# Altium PCB Pedal_Filters.PcbDoc (part 3 of 4)
Units mm, origin at the board's own origin, x right, y up, seen from the top; angles counter-clockwise.
Board outline 120.65 x 86.55 mm, 4 copper layers (Top Layer, Layer 1, Layer 2, Bottom Layer); 245 components, 181 nets, 879 pads, 470 vias.
Unrouted connection lines stored in the file: 24.
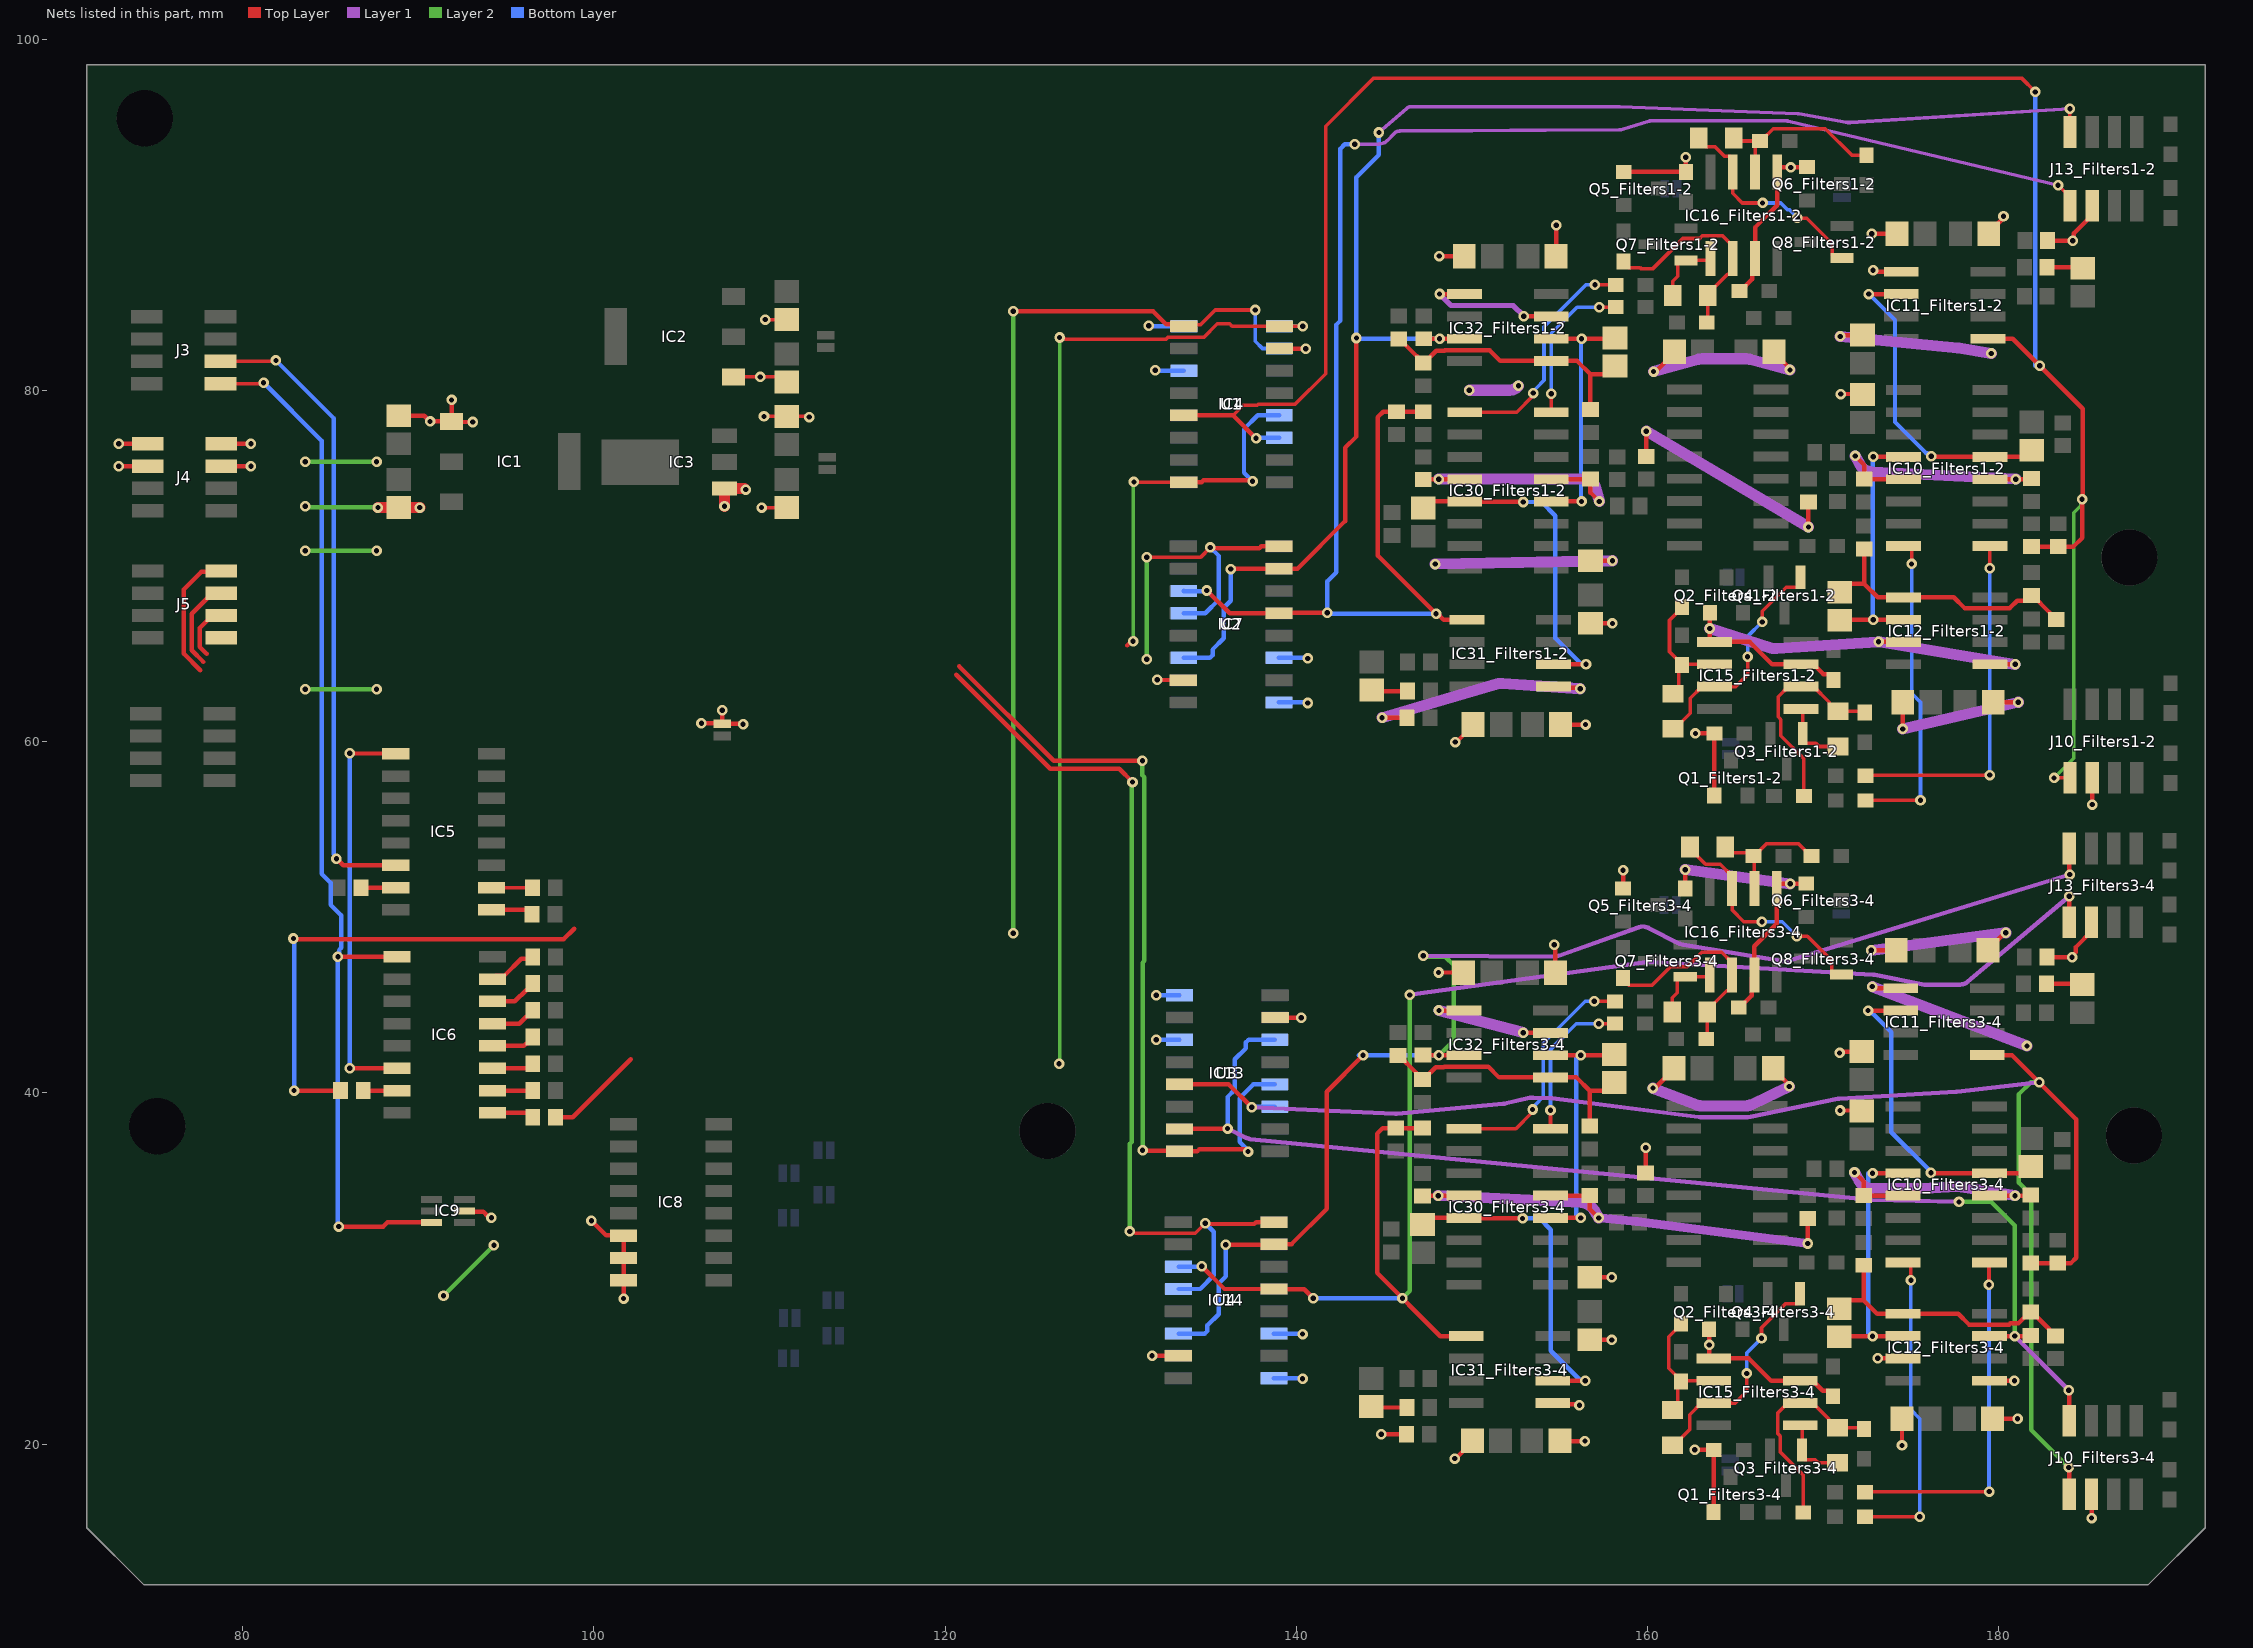
[diagram p5: the nets of this part, all layers, seen from the top]

## Via types
v1: diameter 0.6, hole 0.3, Top Layer to Bottom Layer, tented both sides, 470 vias

## Nets (pads, with @x,y where several pads share a name; then routed paths per layer and width w, separated by ;. In a path a pad name is that pad's centre, name@x,y a point inside that pad or via, vN(x,y) a via of type N, cw(c..) or ccw(c..) an arc to the next point about the centre after c; other vN are vias at no path point) (continued)
Fhp1_Filters3-4: IC12_Filters3-4.7 IC13.7 J10_Filters3-4.8 R5_Filters3-4.2 U3.11 | length 70.3
  Top Layer w0.254: IC13.7@133.339,37.941 133.351,37.953 136.08,37.953 v1(136.091,37.964) ; IC12_Filters3-4.7@179.48,26.151 179.482,26.149 180.911,26.149 v1(180.913,26.151) 181.812,26.151 R5_Filters3-4.2@181.839,26.177 ; v1(184,23.063) 184.012,23.052 184.012,21.347 J10_Filters3-4.8@184.023,21.336
  Layer 1 w0.254: v1(136.091,37.964) 137.157,37.435 ccw(c137.46,38.045) 137.394,37.367 172.673,33.906 ccw(c172.822,35.418) 172.787,33.899 v1(177.743,33.788) ; v1(180.913,26.151) v1(184,23.063)
  Layer 2 w0.254: v1(177.743,33.788) 179.572,33.788 180.913,32.447 v1(180.913,26.151)
  Bottom Layer w0.254: v1(136.091,37.964) 136.091,39.765 136.499,40.173 136.499,41.912 137.136,42.548 137.136,42.872 137.285,43.021 U3.11@138.776,43.021
Fhp2_Filters1-2: IC7.7 IC32_Filters1-2.7 J13_Filters1-2.8 R28_Filters1-2.2 U2.11 | length 86
  Top Layer w0.203: J13_Filters1-2.8@184.061,94.717 v1(184.061,96.043)
  Top Layer w0.254: v1(136.279,69.829) 136.29,69.84 IC7.7@139.018,69.84 ; IC7.7@139.018,69.852 140.072,69.852 142.783,72.563 142.783,76.732 143.431,77.38 v1(143.431,82.989) ; R28_Filters1-2.2@147.257,82.947 IC32_Filters1-2.7@149.59,82.947
  Layer 1 w0.203: v1(144.712,94.69) 146.289,96.062 cw(c146.556,95.756) 146.556,96.162 158.402,96.162 cw(c158.402,95.507) 158.428,96.162 168.573,95.755 cw(c168.557,95.349) 168.628,95.749 171.296,95.274 ccw(c171.483,96.319) 171.549,95.259 v1(184.061,96.043) 183.942,95.961 v1@184.061,95.842
  Bottom Layer w0.254: U2.11@133.594,64.772 135.085,64.772 135.234,64.921 135.234,65.245 135.871,65.881 135.871,67.62 136.279,68.028 v1(136.279,69.829) ; v1(144.712,94.69) 144.712,93.424 143.431,92.144 v1(143.431,82.989) 143.484,82.936 147.9,82.936 v1@147.91,82.947
  other v1: 148.164,82.947
Fhp2_Filters3-4: IC14.7 IC32_Filters3-4.7 J13_Filters3-4.8 R28_Filters3-4.2 U4.11 | length 77
  Top Layer w0.254: v1(135.988,31.348) 135.999,31.359 IC14.7@138.727,31.359 ; IC14.7@138.727,31.371 138.744,31.388 139.734,31.388 141.736,33.39 141.736,40.067 v1(143.804,42.135) ; R28_Filters3-4.2@147.219,42.145 IC32_Filters3-4.7@149.552,42.145 ; J13_Filters3-4.8@184.023,53.916 184.034,53.905 184.034,52.444 v1(184.045,52.433)
  Layer 1 w0.254: v1(147.24,47.811) 154.688,47.757 ccw(c154.692,48.438) 154.921,47.796 159.512,49.435 cw(c159.741,48.793) 160.049,49.401 161.846,48.489 ccw(c162.154,49.097) 162.044,48.425 167.741,47.495 ccw(c167.851,48.167) 168.051,47.516 v1(184.045,52.433)
  Layer 2 w0.254: v1(147.24,47.811) 147.302,47.749 148.485,47.749 148.979,47.254 148.979,42.998 v1(148.126,42.145)
  Bottom Layer w0.254: U4.11@133.303,26.291 134.794,26.291 134.943,26.44 134.943,26.764 135.58,27.4 135.58,29.139 135.988,29.547 v1(135.988,31.348) ; v1@143.55,42.135 v1(143.804,42.135) 147.862,42.135 v1@147.872,42.145
Flp1_Filters1-2: IC4.5 IC11_Filters1-2.1 J10_Filters1-2.7 R7_Filters1-2.1 R10_Filters1-2.2 U1.14 | length 118.8
  Top Layer w0.203: 136.405,78.581 136.978,79.154 137.786,79.154 137.843,79.211 139.934,79.211 141.683,80.96 141.683,95.054 144.419,97.79 181.305,97.79 v1(182.093,97.003) ; v1(183.159,57.937) J10_Filters1-2.7@184.061,57.937
  Top Layer w0.254: IC4.5@133.593,78.581 136.405,78.581 v1@137.701,77.285 ; IC11_Filters1-2.1@179.387,82.95 180.8,82.95 v1(182.347,81.403) 184.798,78.952 184.798,73.856 v1(184.754,73.813) 184.754,71.604 184.26,71.109 R10_Filters1-2.2@183.401,71.109 R7_Filters1-2.1@181.877,71.109
  Layer 2 w0.203: v1(183.159,57.937) 184.28,59.058 184.28,73.028 184.685,73.433 184.685,73.743 v1(184.754,73.813)
  Bottom Layer w0.254: v1(137.714,77.285) 137.749,77.319 139.022,77.319 U1.14@139.03,77.311 ; v1@182.093,81.403 v1(182.093,97.003)
Flp1_Filters3-4: IC11_Filters3-4.1 IC13.5 J10_Filters3-4.7 R7_Filters3-4.1 R10_Filters3-4.2 U3.14 | length 93.7
  Top Layer w0.254: IC13.5@133.352,40.481 136.164,40.481 v1(137.46,39.185) ; IC11_Filters3-4.1@179.349,42.149 180.762,42.149 184.422,38.489 184.422,30.613 184.117,30.308 R7_Filters3-4.1@181.839,30.308 ; v1(183.999,18.669) 184.011,18.657 184.011,17.148 J10_Filters3-4.7@184.023,17.136
  Layer 1 w0.254: v1(137.46,39.185) 145.637,38.802 ccw(c145.669,39.482) 145.733,38.804 151.792,39.378 ccw(c151.728,40.056) 151.878,39.392 153.309,39.716 cw(c153.46,39.052) 153.488,39.733 154.508,39.691 cw(c154.48,39.01) 154.565,39.686 162.915,38.625 ccw(c163.106,40.132) 163.106,38.613 165.57,38.613 ccw(c165.57,40.132) 165.876,38.644 170.835,39.664 cw(c170.972,38.997) 170.931,39.677 177.586,40.072 ccw(c177.546,40.752) 177.622,40.075 v1(182.309,40.602)
  Layer 2 w0.254: v1(182.309,40.602) 181.826,40.602 181.158,39.934 181.158,34.887 181.864,34.18 181.864,20.804 v1(183.999,18.669)
  Bottom Layer w0.254: v1(137.46,39.185) 137.495,39.219 138.768,39.219 U3.14@138.776,39.211
Flp2_Filters1-2: IC7.5 IC31_Filters1-2.1 J13_Filters1-2.7 R23_Filters1-2.2 R26_Filters1-2.1 U2.14 | length 102.1
  Top Layer w0.203: v1(183.388,91.694) 183.766,91.316 183.783,91.316 184.061,91.037 J13_Filters1-2.7@184.061,90.517
  Top Layer w0.254: v1(134.91,68.608) 136.206,67.312 IC7.5@139.018,67.312 139.036,67.33 141.752,67.33 v1(141.769,67.348) ; R26_Filters1-2.1@147.231,78.789 144.953,78.789 144.648,78.484 144.648,70.599 v1(147.961,67.285) 148.055,67.285 148.391,66.949 IC31_Filters1-2.1@149.72,66.948
  Layer 1 w0.203: v1(143.328,94.025) 144.716,94.034 ccw(c144.712,94.69) 145.175,94.226 145.6,94.651 cw(c145.905,94.345) 145.902,94.777 158.406,94.851 ccw(c158.402,95.507) 158.593,94.88 160.069,95.33 cw(c160.196,94.918) 160.196,95.349 167.927,95.349 cw(c167.927,94.918) 168.027,95.338 v1(183.388,91.694)
  Bottom Layer w0.254: U2.14@133.594,68.582 133.602,68.574 134.875,68.574 v1(134.91,68.608) ; v1(143.328,94.025) 142.77,94.025 142.517,93.772 142.517,83.981 142.291,83.755 142.291,69.647 141.769,69.125 v1(141.769,67.348) 141.832,67.285 v1(147.961,67.285)
Flp2_Filters3-4: IC14.5 IC31_Filters3-4.1 J13_Filters3-4.7 R23_Filters3-4.2 R26_Filters3-4.1 U4.14 | length 89
  Top Layer w0.254: v1(134.619,30.127) 135.915,28.831 IC14.5@138.727,28.831 138.744,28.814 140.462,28.814 v1(140.97,28.306) ; R26_Filters3-4.1@147.193,37.988 144.915,37.988 144.61,37.683 144.61,29.746 148.209,26.147 IC31_Filters3-4.1@149.682,26.147 ; J13_Filters3-4.7@184.023,49.716 v1(184.023,51.19)
  Layer 1 w0.254: v1(146.461,45.58) 159.888,47.449 cw(c159.982,46.774) 160.02,47.454 172.848,46.731 cw(c172.809,46.051) 172.943,46.719 175.634,46.18 ccw(c175.768,46.848) 175.768,46.167 177.8,46.167 ccw(c177.8,46.848) 178.238,46.327 v1(184.023,51.19)
  Layer 2 w0.254: v1(146.05,28.306) 146.465,28.721 146.465,45.575 v1(146.461,45.58)
  Bottom Layer w0.254: U4.14@133.303,30.101 133.311,30.093 134.584,30.093 v1(134.619,30.127) ; v1(140.97,28.306) v1@145.796,28.306
Fout_1: IC4.8 J5.7 U1.13 | length 22.1
  Top Layer w0.203: v1(130.758,74.792) 130.775,74.774 IC4.8@133.59,74.774
  Top Layer w0.254: J5.7@78.786,65.913 J5.7@78.969,65.73 ; 130.368,65.476 130.615,65.723 v1(130.709,65.723) ; IC4.8@133.593,74.771 134.611,74.771 134.72,74.88 137.466,74.88 v1(137.513,74.833)
  Layer 2 w0.203: v1(130.709,65.723) 130.709,74.743 v1(130.758,74.792)
  Bottom Layer w0.254: v1(137.513,74.833) 137.026,75.319 137.026,77.8 137.807,78.581 U1.13@139.03,78.581
Fout_2: IC7.8 J5.5 U2.13 | length 22.4
  Top Layer w0.203: v1(131.482,70.502) 131.491,70.492 134.544,70.492 v1(135.111,71.06)
  Top Layer w0.254: 77.958,64.994 77.556,65.396 77.556,66.473 78.255,67.172 J5.5@78.775,67.172 ; v1@131.451,64.74 v1(131.494,64.698) ; v1(135.111,71.06) 135.158,71.013 137.904,71.013 138.013,71.122 IC7.8@139.018,71.122
  Layer 2 w0.254: v1(131.482,70.502) 131.494,70.49 v1(131.494,64.698)
  Bottom Layer w0.254: U2.13@133.594,67.312 134.817,67.312 135.598,68.093 135.598,70.574 v1(135.111,71.06)
Fout_3: IC13.8 J5.3 U3.13 | length 51.8
  Top Layer w0.203: v1(131.249,36.734) v1@131.311,36.671
  Top Layer w0.254: 77.768,64.537 77.099,65.207 77.099,67.286 78.266,68.453 J5.3@78.786,68.453 ; 120.816,64.283 126.186,58.913 v1(131.241,58.913) ; v1@131.311,36.671 131.343,36.702 133.321,36.702 IC13.8@133.352,36.671 134.357,36.671 134.466,36.78 137.042,36.78 137.165,36.657 v1(137.259,36.657)
  Layer 2 w0.254: v1(131.241,58.913) 131.241,58.097 131.357,57.981 131.357,47.513 131.249,47.404 v1(131.249,36.734)
  Bottom Layer w0.254: v1(137.259,36.657) 137.259,36.733 136.772,37.219 136.772,39.7 137.553,40.481 U3.13@138.776,40.481
Fout_4: IC14.8 J5.1 U4.13 | length 59.5
  Top Layer w0.203: 130.841,32.011 134.253,32.011 v1(134.82,32.579)
  Top Layer w0.254: 77.586,64.072 76.641,65.017 76.641,68.666 77.654,69.679 78.742,69.679 J5.1@78.786,69.723 ; 120.635,63.818 125.997,58.456 129.919,58.456 v1(130.676,57.699) ; v1(134.82,32.579) 134.867,32.532 137.613,32.532 137.722,32.641 IC14.8@138.74,32.641
  Layer 2 w0.254: v1(130.523,32.11) 130.523,37.089 130.636,37.202 130.636,56.999 130.634,57.001 130.634,57.656 v1(130.676,57.699)
  Bottom Layer w0.254: U4.13@133.303,28.831 134.526,28.831 135.307,29.612 135.307,32.093 v1(134.82,32.579)
Freq1_1_Filters1-2: IC10_Filters1-2.1 R49_Filters1-2.1 | length 20.1
  Top Layer w0.203: R49_Filters1-2.1@172.426,58.058 172.464,58.096 v1(179.497,58.096) ; v1(179.489,69.869) 179.489,71.114 IC10_Filters1-2.1@179.514,71.139
  Bottom Layer w0.203: v1(179.489,69.869) 179.489,58.104 v1(179.497,58.096)
Freq1_1_Filters3-4: IC10_Filters3-4.1 R49_Filters3-4.1 | length 20.1
  Top Layer w0.203: R49_Filters3-4.1@172.388,17.257 172.426,17.295 v1(179.459,17.295) ; v1(179.451,29.068) 179.451,30.313 IC10_Filters3-4.1@179.476,30.338
  Bottom Layer w0.203: v1(179.451,29.068) 179.451,17.303 v1(179.459,17.295)
Freq1_2_Filters1-2: IC30_Filters1-2.1 R60_Filters1-2.1 | length 13.3
  Top Layer w0.203: IC30_Filters1-2.1@149.593,78.759 152.55,78.759 v1@153.454,79.663 ; v1(157.01,86.013) R60_Filters1-2.1@158.192,86.013
  Bottom Layer w0.203: v1(153.498,79.853) 153.498,79.961 153.668,80.131 154.111,80.574 154.111,83.622 156.502,86.013 v1(157.01,86.013)
Freq1_2_Filters3-4: IC30_Filters3-4.1 R60_Filters3-4.1 | length 13.3
  Top Layer w0.203: IC30_Filters3-4.1@149.555,37.958 152.512,37.958 v1@153.416,38.862 ; v1(156.972,45.212) R60_Filters3-4.1@158.154,45.212
  Bottom Layer w0.203: v1(153.46,39.052) 153.46,39.16 153.63,39.33 154.073,39.773 154.073,42.821 156.464,45.212 v1(156.972,45.212)
Freq2_1_Filters1-2: IC10_Filters1-2.16 R50_Filters1-2.1 | length 17.9
  Top Layer w0.203: R50_Filters1-2.1@172.426,56.661 v1(175.552,56.661) ; IC10_Filters1-2.16@174.866,71.139 175.044,70.961 v1(175.044,70.123)
  Bottom Layer w0.203: v1(175.044,70.123) 175.044,62.757 175.552,62.249 v1(175.552,56.661)
Freq2_1_Filters3-4: IC10_Filters3-4.16 R50_Filters3-4.1 | length 18.2
  Top Layer w0.203: R50_Filters3-4.1@172.388,15.86 v1(175.514,15.86) ; IC10_Filters3-4.16@174.549,30.338 174.828,30.338 175.006,30.16 v1(175.006,29.322)
  Bottom Layer w0.203: v1(175.006,29.322) 175.006,21.956 175.514,21.448 v1(175.514,15.86)
Freq2_2_Filters1-2: IC30_Filters1-2.16 R61_Filters1-2.1 | length 8.8
  Top Layer w0.203: v1(154.518,79.811) 154.518,78.762 IC30_Filters1-2.16@154.521,78.759 ; v1(157.264,84.743) R61_Filters1-2.1@158.192,84.743
  Bottom Layer w0.203: v1(154.518,79.811) 154.518,83.267 155.994,84.743 v1(157.264,84.743)
Freq2_2_Filters3-4: IC30_Filters3-4.16 R61_Filters3-4.1 | length 8.8
  Top Layer w0.203: v1(154.48,39.01) 154.48,37.961 IC30_Filters3-4.16@154.483,37.958 ; v1(157.226,43.942) R61_Filters3-4.1@158.154,43.942
  Bottom Layer w0.203: v1(154.48,39.01) 154.48,42.466 155.956,43.942 v1(157.226,43.942)
GND: C1.1 C2.1 C3.2 C4.1 C7.2 C8.2 C13_Filters1-2.2 C13_Filters3-4.2 C14_Filters1-2.2 C14_Filters3-4.2 C15_Filters1-2.2 C15_Filters3-4.2 C16_Filters1-2.2 C16_Filters3-4.2 C17_Filters1-2.2 C17_Filters3-4.2 C18_Filters1-2.2 C18_Filters3-4.2 C19_Filters1-2.2 C19_Filters3-4.2 C20_Filters1-2.1 C20_Filters3-4.1 C21_Filters1-2.1 C21_Filters3-4.1 C22_Filters1-2.1 C22_Filters3-4.1 C23_Filters1-2.1 C23_Filters3-4.1 C24_Filters1-2.1 C24_Filters3-4.1 C25_Filters1-2.1 C25_Filters3-4.1 C26_Filters1-2.1 C26_Filters3-4.1 IC1.1 IC2.1 IC3.1 IC4.15 IC7.15 IC8.6 IC8.7 IC8.8 IC9.5 IC10_Filters1-2.4 IC10_Filters1-2.13 IC10_Filters3-4.4 IC10_Filters3-4.13 IC11_Filters1-2.5 IC11_Filters3-4.5 IC12_Filters1-2.3 IC12_Filters1-2.5 IC12_Filters3-4.3 IC12_Filters3-4.5 IC13.15 IC14.15 IC15_Filters1-2.3 IC15_Filters1-2.5 IC15_Filters3-4.3 IC15_Filters3-4.5 IC16_Filters1-2.3 IC16_Filters1-2.5 IC16_Filters3-4.3 IC16_Filters3-4.5 IC30_Filters1-2.4 IC30_Filters1-2.13 IC30_Filters3-4.4 IC30_Filters3-4.13 IC31_Filters1-2.5 IC31_Filters3-4.5 IC32_Filters1-2.3 IC32_Filters1-2.5 IC32_Filters3-4.3 IC32_Filters3-4.5 J4.1 J4.2 J4.3 J4.4 J6.2 J10_Filters1-2.5 J10_Filters3-4.5 J13_Filters1-2.5 J13_Filters3-4.5 Q1_Filters1-2.1 Q1_Filters3-4.1 Q2_Filters1-2.1 Q2_Filters3-4.1 Q5_Filters1-2.1 Q5_Filters3-4.1 Q6_Filters1-2.1 Q6_Filters3-4.1 R1_Filters1-2.1 R1_Filters3-4.1 R3_Filters1-2.1 R3_Filters3-4.1 R12_Filters1-2.1 R12_Filters3-4.1 R14_Filters1-2.1 R14_Filters3-4.1 R17_Filters1-2.1 R17_Filters3-4.1 R19_Filters1-2.1 R19_Filters3-4.1 R30_Filters1-2.1 R30_Filters3-4.1 R32_Filters1-2.1 R32_Filters3-4.1 R43_Filters1-2.2 R43_Filters3-4.2 R45_Filters1-2.2 R45_Filters3-4.2 R53_Filters1-2.2 R53_Filters3-4.2 R55_Filters1-2.2 R55_Filters3-4.2 U1.6 U1.8 U2.6 U2.8 U3.6 U3.8 U4.6 U4.8 | length 399
  Top Layer w0.203: IC2.1@107.95,80.772 v1(109.474,80.772) 110.706,80.772 C4.1@110.998,80.48 ; v1@108.585,74.422 v1(108.649,74.359) ; v1(109.55,73.33) C7.2@110.998,73.33 ; v1(109.69,78.524) 112.23,78.524 v1(112.268,78.486) ; v1(109.766,84.036) C3.2@110.998,84.036
  Top Layer w0.254: v1(72.944,75.692) J4.4@74.586,75.692 ; v1(72.944,76.962) J4.2@74.586,76.962 ; J4.3@78.786,75.692 v1(80.474,75.692) ; J4.1@78.786,76.962 v1(80.474,76.962) ; C2.1@88.9,78.562 90.348,78.562 v1(90.674,78.236) IC1.1@91.9,78.236 v1(91.9,79.462) ; IC1.1@91.883,78.204 v1(93.109,78.204) ; IC9.5@92.644,33.274 92.675,33.243 93.696,33.243 93.992,32.947 94.101,32.947 v1(94.167,32.881) ; v1(99.865,32.723) 100.696,31.892 101.668,31.892 IC8.6@101.691,31.87 IC8.8@101.691,29.33 v1(101.691,28.285) ; v1@106.146,61.037 106.149,61.04 107.295,61.04 J6.2@107.297,61.037 ; J6.2@107.315,61.025 v1(107.315,61.787) ; J6.2@107.333,61.013 107.335,61.01 108.487,61.01 v1(108.501,60.995) ; v1(131.788,25.024) 131.79,25.022 133.289,25.022 IC14.15@133.29,25.021 ; v1(132.079,63.52) 132.088,63.511 133.572,63.511 IC7.15@133.581,63.502 ; IC13.15@138.789,44.291 138.798,44.282 140.282,44.282 v1(140.291,44.273) ; IC4.15@139.043,82.391 139.052,82.382 140.536,82.382 v1(140.545,82.373) ; v1@144.855,20.559 144.862,20.566 146.267,20.566 R19_Filters3-4.1@146.274,20.559 ; v1@144.893,61.36 144.9,61.367 146.305,61.367 R19_Filters1-2.1@146.312,61.36 ; R30_Filters3-4.1@147.193,34.118 147.223,34.148 IC30_Filters3-4.4@149.555,34.148 ; R30_Filters1-2.1@147.231,74.919 147.261,74.949 v1(148.12,74.949) IC30_Filters1-2.4@149.593,74.949 ; v1@148.111,46.848 148.118,46.855 149.523,46.855 C22_Filters3-4.1@149.53,46.848 ; v1@148.133,44.685 148.136,44.689 149.548,44.689 IC32_Filters3-4.5@149.552,44.685 ; v1@148.149,87.649 148.156,87.656 149.561,87.656 C22_Filters1-2.1@149.568,87.649 ; v1@148.171,85.487 148.174,85.49 149.586,85.49 IC32_Filters1-2.5@149.59,85.487 ; v1@149.035,19.175 149.085,19.175 150.038,20.128 C21_Filters3-4.1@150.038,20.178 ; v1@149.073,59.976 149.123,59.976 150.076,60.929 C21_Filters1-2.1@150.076,60.979 ; v1(152.923,43.43) 152.93,43.423 154.472,43.423 IC32_Filters3-4.3@154.479,43.415 ; v1(152.961,84.231) 152.968,84.224 154.51,84.224 IC32_Filters1-2.3@154.517,84.217 ; IC30_Filters3-4.13@154.483,34.148 R32_Filters3-4.1@156.718,34.148 156.718,33.386 v1(157.226,32.878) ; IC30_Filters1-2.13@154.521,74.949 R32_Filters1-2.1@156.756,74.949 156.756,74.187 v1(157.264,73.679) ; IC31_Filters3-4.5@154.61,22.337 154.673,22.273 156.067,22.273 v1(156.13,22.21) ; IC31_Filters1-2.5@154.648,63.138 154.711,63.075 156.105,63.075 v1(156.168,63.011) ; v1(154.692,48.438) 154.692,48.344 154.762,48.275 C15_Filters3-4.2@154.762,46.848 ; C15_Filters1-2.2@154.8,87.649 154.812,87.661 v1(154.812,89.415) ; C14_Filters3-4.2@155.016,20.178 155.023,20.171 156.428,20.171 v1@156.435,20.178 ; C14_Filters1-2.2@155.054,60.979 155.061,60.972 156.466,60.972 v1@156.473,60.979 ; C25_Filters3-4.1@156.718,25.944 156.73,25.932 v1(157.967,25.932) ; C19_Filters3-4.2@156.718,29.5 v1(157.968,29.5) ; C25_Filters1-2.1@156.756,66.745 156.768,66.733 v1(158.005,66.733) ; C19_Filters1-2.2@156.756,70.301 v1(158.006,70.301) ; Q5_Filters3-4.1@158.614,51.648 v1(158.614,52.677) ; Q5_Filters1-2.1@158.652,92.45 R53_Filters1-2.2@162.18,92.45 ; R17_Filters3-4.1@159.893,35.448 159.9,35.455 159.9,36.86 v1@159.893,36.867 ; R17_Filters1-2.1@159.931,76.249 159.938,76.256 159.938,77.661 v1@159.931,77.668 ; v1(160.312,40.274) 160.378,40.34 160.494,40.34 161.506,41.352 C18_Filters3-4.2@161.506,41.402 ; v1(160.35,81.075) 160.416,81.141 160.532,81.141 161.544,82.153 C18_Filters1-2.2@161.544,82.203 ; R53_Filters3-4.2@162.154,51.636 v1(162.154,52.713) ; v1(162.176,93.288) 162.176,92.454 R53_Filters1-2.2@162.18,92.45 ; R53_Filters1-2.2@162.192,92.438 R53_Filters1-2.2@162.18,92.45 ; v1(162.702,19.67) R43_Filters3-4.2@163.781,19.67 163.769,19.658 Q1_Filters3-4.1@163.769,16.13 ; v1(162.735,60.471) R43_Filters1-2.2@163.819,60.471 163.807,60.459 Q1_Filters1-2.1@163.807,56.931 ; Q2_Filters3-4.1@163.515,26.544 163.515,25.029 163.667,24.877 165.77,24.877 167.04,23.607 169.418,23.607 169.984,23.041 170.288,23.041 170.561,22.768 R45_Filters3-4.2@170.561,22.718 ; Q2_Filters1-2.1@163.553,67.345 163.553,65.831 163.705,65.678 165.827,65.678 167.097,64.408 169.456,64.408 170.022,63.842 170.326,63.842 170.599,63.569 R45_Filters1-2.2@170.599,63.519 ; R55_Filters3-4.2@165.202,44.856 165.252,44.856 165.938,45.543 165.938,46.558 IC16_Filters3-4.3@166.091,46.711 166.091,48.358 167.361,49.628 167.361,51.75 167.513,51.902 Q6_Filters3-4.1@169.028,51.902 ; R55_Filters1-2.2@165.24,85.658 165.29,85.658 165.976,86.344 165.976,87.359 IC16_Filters1-2.3@166.129,87.512 166.129,89.284 167.399,90.554 167.399,92.551 167.551,92.704 Q6_Filters1-2.1@169.066,92.704 ; C26_Filters3-4.1@167.17,41.402 167.17,41.352 168.077,40.445 v1(168.077,40.369) ; C26_Filters1-2.1@167.208,82.153 168.115,81.247 v1(168.115,81.17) ; v1@169.139,31.429 169.132,31.436 169.132,32.841 R14_Filters3-4.1@169.139,32.848 ; v1@169.177,72.231 169.17,72.237 169.17,73.642 R14_Filters1-2.1@169.177,73.649 ; v1(170.942,42.276) 171.036,42.276 171.112,42.352 C23_Filters3-4.1@172.212,42.352 ; v1(170.972,38.997) 172.189,38.997 C16_Filters3-4.2@172.212,38.974 ; v1(170.98,83.077) 171.074,83.077 171.15,83.153 C23_Filters1-2.1@172.25,83.153 ; v1(171.01,79.798) 172.227,79.798 C16_Filters1-2.2@172.25,79.775 ; v1(171.794,35.47) 172.314,34.95 R1_Filters3-4.1@172.314,34.148 IC10_Filters3-4.13@174.549,34.148 ; v1(171.832,76.272) 172.352,75.752 R1_Filters1-2.1@172.352,74.949 IC10_Filters1-2.13@174.587,74.949 ; v1@172.749,48.118 172.756,48.125 174.161,48.125 C13_Filters3-4.2@174.168,48.118 ; v1@172.787,88.919 172.794,88.926 174.199,88.926 C13_Filters1-2.2@174.206,88.919 ; v1(172.809,46.051) 172.903,46.051 172.995,45.959 IC11_Filters3-4.5@174.422,45.959 ; v1(172.847,86.852) 172.941,86.852 173.033,86.76 IC11_Filters1-2.5@174.46,86.76 ; v1@173.13,24.877 173.134,24.88 174.545,24.88 IC12_Filters3-4.3@174.549,24.877 ; v1@173.168,65.678 173.172,65.682 174.583,65.682 IC12_Filters1-2.3@174.587,65.678 ; v1(174.498,19.924) C17_Filters3-4.2@174.498,21.448 ; v1(174.536,60.725) C17_Filters1-2.2@174.536,62.249 ; C20_Filters3-4.1@179.4,48.118 179.4,48.168 180.353,49.121 v1@180.403,49.121 ; C20_Filters1-2.1@179.438,88.969 180.211,89.742 180.211,89.856 v1(180.277,89.922) ; IC12_Filters3-4.5@179.476,23.607 179.48,23.604 180.892,23.604 v1@180.895,23.607 ; IC10_Filters3-4.4@179.476,34.148 181.809,34.148 R3_Filters3-4.1@181.839,34.178 ; IC12_Filters1-2.5@179.514,64.408 179.518,64.405 180.93,64.405 v1@180.933,64.408 ; IC10_Filters1-2.4@179.514,74.949 181.847,74.949 R3_Filters1-2.1@181.877,74.979 ; C24_Filters3-4.1@179.654,21.448 179.661,21.441 181.066,21.441 v1@181.073,21.448 ; C24_Filters1-2.1@179.692,62.249 179.699,62.242 181.104,62.242 v1@181.111,62.249 ; R12_Filters3-4.1@182.758,47.737 182.764,47.73 184.169,47.73 v1@184.176,47.737 ; R12_Filters1-2.1@182.796,88.538 182.802,88.531 184.207,88.531 v1@184.214,88.538 ; v1(184.221,88.531) 184.287,88.598 184.287,88.953 185.331,89.997 J13_Filters1-2.5@185.331,90.517 ; 184.404,48.006 184.404,48.307 185.293,49.196 J13_Filters3-4.5@185.293,49.716 ; v1(185.293,15.786) J10_Filters3-4.5@185.293,17.136 ; v1(185.331,56.418) J10_Filters1-2.5@185.331,57.937
  Top Layer w0.635: v1(87.706,73.33) C1.1@88.9,73.33 v1(90.094,73.33) ; v1(107.442,73.406) IC3.1@107.442,74.422 v1@108.585,74.422
  Layer 1 w0.305: v1(148.164,85.493) 148.819,84.839 152.353,84.839 v1(152.961,84.231)
  Layer 1 w0.508: v1@157.26,32.887 v1(157.226,32.878) cw(c157.322,32.379) 157.373,32.885 159.386,32.68 cw(c159.258,31.421) 159.42,32.676 v1(169.132,31.423)
  Layer 1 w0.635: v1(144.887,61.367) 151.431,63.282 cw(c151.676,62.446) 151.736,63.315 v1(156.168,63.011) ; v1(147.912,70.114) v1(158.006,70.301) ; v1(148.082,34.148) 156.253,33.748 cw(c156.21,32.878) 156.958,33.326 v1(157.226,32.878) ; v1(148.12,74.949) 156.436,74.949 156.438,74.949 cw(c156.434,74.314) 157.047,74.48 v1(157.264,73.679) ; v1(148.126,44.692) v1(152.923,43.43) ; v1(149.86,80.01) 152.137,80.01 ccw(c152.137,80.645) 152.585,80.195 v1(152.654,80.264) ; v1(159.938,77.675) v1(169.17,72.224) ; v1(160.312,40.274) 162.793,39.319 ccw(c163.106,40.132) 163.106,39.261 165.57,39.261 ccw(c165.57,40.132) 165.947,39.346 v1(168.077,40.369) ; v1(160.35,81.075) 162.915,81.774 cw(c163.144,80.933) 163.144,81.805 165.608,81.805 cw(c165.608,80.933) 165.832,81.776 v1(168.115,81.17) ; v1(162.154,52.713) v1(168.127,51.902) ; v1(163.553,66.445) 167.024,65.338 ccw(c167.288,66.168) 167.346,65.299 173.117,65.683 cw(c173.162,65.05) v1(173.161,65.685) cw(c173.162,65.05) 173.266,65.676 v1(180.94,64.401) ; v1(170.98,83.077) 177.669,82.421 cw(c177.584,81.553) 177.726,82.413 v1(179.578,82.107) ; v1(171.794,35.47) 172.061,34.992 ccw(c172.822,35.418) 172.83,34.547 176.151,34.578 ccw(c176.143,35.449) 176.189,34.579 177.697,34.658 cw(c177.743,33.788) 177.884,34.648 v1(180.933,34.148) ; v1(171.832,76.272) 172.099,75.794 ccw(c172.86,76.219) 172.817,75.349 v1(180.971,74.949) ; v1@172.767,48.1 v1(180.413,49.121) ; v1(172.809,46.051) v1(181.61,42.672) ; v1(174.536,60.725) v1(181.117,62.242)
  Layer 2 w0.254: v1(83.566,62.992) v1(87.63,62.992) ; v1(83.566,70.866) v1(87.63,70.866) ; v1(83.566,73.406) 83.622,73.35 87.686,73.35 v1(87.706,73.33) ; v1(83.566,75.946) v1(87.63,75.946) ; v1(91.44,28.448) v1(94.314,31.322)
  Bottom Layer w0.254: v1(131.594,83.684) 131.617,83.661 U1.8@133.606,83.661 ; v1(131.973,81.15) 132.002,81.121 U1.6@133.606,81.121 ; v1(132.023,43.019) v1(132.023,43.019) U3.6@133.352,43.021 ; v1(132.023,45.565) 132.027,45.561 U3.8@133.352,45.561 ; U4.8@138.727,23.751 140.331,23.751 v1(140.36,23.722) ; U4.6@138.727,26.291 140.331,26.291 v1(140.36,26.262) ; U2.8@139.018,62.232 140.622,62.232 v1(140.651,62.203) ; U2.6@139.018,64.772 140.622,64.772 v1(140.651,64.743)
  other v1: 149.025,19.175 156.441,20.171 144.849,20.566 181.079,21.441 180.902,23.6 173.123,24.884 163.515,25.644 159.9,36.873 148.105,46.855 184.183,47.73 172.743,48.125 149.063,59.976 156.479,60.972 106.129,61.055 148.143,87.656 172.781,88.926 168.165,92.704
MISO: IC6.9 IC9.3 J3.7 | length 61.2
  Top Layer w0.203: J3.7@78.74,80.391 81.146,80.391 v1(81.194,80.439)
  Top Layer w0.254: v1(85.425,47.752) IC6.9@88.784,47.752 ; v1(85.471,32.385) 88.011,32.385 88.25,32.624 IC9.3@90.744,32.624
  Bottom Layer w0.254: v1(81.194,80.439) 84.496,77.137 84.496,52.484 85.009,51.971 85.009,50.713 85.617,50.105 85.617,48.26 85.491,48.135 85.491,47.818 v1(85.425,47.752) 85.425,32.431 v1(85.471,32.385)
MOSI: IC5.14 J3.5 | length 36.5
  Top Layer w0.203: J3.5@78.74,81.661 81.849,81.661 v1(81.898,81.71)
  Top Layer w0.254: v1(85.344,53.34) 85.725,52.959 IC5.14@88.715,52.959
  Bottom Layer w0.254: v1(81.898,81.71) 85.2,78.408 85.2,53.577 85.344,53.434 v1(85.344,53.34)
NetC1_Filters1-2_1: C1_Filters1-2.1 IC15_Filters1-2.1 Q3_Filters1-2.1 | length 4
  Top Layer w0.203: IC15_Filters1-2.1@168.796,61.868 168.846,61.817 168.846,60.311 168.973,60.184 168.973,59.963 169.024,59.912 169.596,59.912 169.783,59.725 C1_Filters1-2.1@170.853,59.725
NetC1_Filters1-2_2: C1_Filters1-2.2 IC15_Filters1-2.2 R42_Filters1-2.1 R47_Filters1-2.2 | length 12.1
  Top Layer w0.203: R42_Filters1-2.1@168.909,56.915 168.909,59.038 167.602,60.345 167.602,61.258 167.449,61.41 167.449,62.554 168.034,63.138 169.456,63.138 170.355,62.24 170.355,62.124 170.753,61.725 172.315,61.725 R47_Filters1-2.2@172.377,61.663
NetC1_Filters3-4_1: C1_Filters3-4.1 IC15_Filters3-4.1 Q3_Filters3-4.1 | length 4
  Top Layer w0.203: IC15_Filters3-4.1@168.707,21.067 168.808,20.965 168.808,19.51 168.935,19.383 168.935,19.162 168.986,19.111 169.558,19.111 169.745,18.924 C1_Filters3-4.1@170.815,18.924
NetC1_Filters3-4_2: C1_Filters3-4.2 IC15_Filters3-4.2 R42_Filters3-4.1 R47_Filters3-4.2 | length 12.1
  Top Layer w0.203: R42_Filters3-4.1@168.871,16.114 168.871,18.237 167.564,19.544 167.564,20.457 167.411,20.609 167.411,21.753 167.996,22.337 169.418,22.337 170.317,21.438 170.317,21.322 170.715,20.924 172.277,20.924 R47_Filters3-4.2@172.339,20.862
NetC2_Filters1-2_1: C2_Filters1-2.1 IC15_Filters1-2.7 Q4_Filters1-2.1 | length 13.1
  Top Layer w0.203: C2_Filters1-2.1@161.555,60.741 162.441,61.627 162.441,62.473 163.106,63.138 165.031,63.138 165.703,63.81 v1(165.703,64.839) ; v1(166.535,66.821) 166.535,67.43 167.907,68.802 168.542,68.802 168.719,68.98 Q4_Filters1-2.1@168.719,69.361
  Bottom Layer w0.203: v1(165.703,64.839) 165.703,65.99 v1(166.535,66.821)
NetC2_Filters1-2_2: C2_Filters1-2.2 IC15_Filters1-2.6 R44_Filters1-2.1 R48_Filters1-2.2 | length 7.5
  Top Layer w0.203: C2_Filters1-2.2@161.709,62.757 161.777,62.825 161.777,64.173 R48_Filters1-2.2@161.963,64.359 ; R44_Filters1-2.1@161.963,67.661 161.963,67.611 161.258,66.906 161.258,65.114 161.963,64.409 R48_Filters1-2.2@161.963,64.359 ; IC15_Filters1-2.6@163.817,64.408 162.012,64.408 R48_Filters1-2.2@161.963,64.359
NetC2_Filters3-4_1: C2_Filters3-4.1 IC15_Filters3-4.7 Q4_Filters3-4.1 | length 13.2
  Top Layer w0.203: C2_Filters3-4.1@161.417,19.94 161.517,19.94 162.403,20.826 162.403,21.672 163.068,22.337 164.993,22.337 165.662,23.005 v1(165.662,24.022) ; v1(166.497,26.02) 166.497,26.629 167.869,28.001 168.504,28.001 168.681,28.179 Q4_Filters3-4.1@168.681,28.56
  Bottom Layer w0.203: v1(165.662,24.022) 165.665,24.026 165.665,25.188 v1(166.497,26.02)
NetC2_Filters3-4_2: C2_Filters3-4.2 IC15_Filters3-4.6 R44_Filters3-4.1 R48_Filters3-4.2 | length 7.5
  Top Layer w0.203: C2_Filters3-4.2@161.671,21.956 161.739,22.024 161.739,23.372 R48_Filters3-4.2@161.925,23.558 ; R44_Filters3-4.1@161.925,26.86 161.925,26.81 161.22,26.105 161.22,24.313 161.925,23.608 R48_Filters3-4.2@161.925,23.558 ; IC15_Filters3-4.6@163.779,23.607 161.974,23.607 R48_Filters3-4.2@161.925,23.558
NetC5_Filters1-2_1: C5_Filters1-2.1 IC12_Filters1-2.1 R2_Filters1-2.1 R8_Filters1-2.2 R11_Filters1-2.2 | length 16
  Top Layer w0.254: C5_Filters1-2.1@170.955,68.51 171.425,68.98 172.352,68.98 ; R8_Filters1-2.2@172.352,70.982 172.352,68.98 ; R2_Filters1-2.1@183.274,66.963 183.224,66.963 182.926,67.261 182.926,67.331 181.927,68.33 181.827,68.33 181.529,68.032 181.065,68.032 180.642,67.609 178.059,67.609 177.449,68.218 IC12_Filters1-2.1@174.587,68.218 173.114,68.218 172.352,68.98
NetC5_Filters1-2_2: C5_Filters1-2.2 IC10_Filters1-2.12 IC12_Filters1-2.2 | length 14.6
  Top Layer w0.254: C5_Filters1-2.2@170.955,66.91 170.993,66.948 IC12_Filters1-2.2@174.587,66.948 ; v1(172.86,76.219) IC10_Filters1-2.12@174.587,76.219
  Bottom Layer w0.254: v1@172.832,66.948 v1@172.832,76.219
  other v1: 172.86,66.948
NetC5_Filters3-4_1: C5_Filters3-4.1 IC12_Filters3-4.1 R2_Filters3-4.1 R8_Filters3-4.2 R11_Filters3-4.2 | length 16
  Top Layer w0.254: C5_Filters3-4.1@170.917,27.709 171.387,28.179 172.314,28.179 ; R8_Filters3-4.2@172.314,30.181 172.314,28.179 ; R2_Filters3-4.1@183.236,26.162 183.186,26.162 182.888,26.46 182.888,26.53 181.889,27.529 181.789,27.529 181.131,26.872 180.671,26.872 180.606,26.807 178.314,26.807 177.705,27.417 IC12_Filters3-4.1@174.549,27.417 173.076,27.417 172.314,28.179
NetC5_Filters3-4_2: C5_Filters3-4.2 IC10_Filters3-4.12 IC12_Filters3-4.2 | length 14.6
  Top Layer w0.254: C5_Filters3-4.2@170.917,26.109 170.955,26.147 IC12_Filters3-4.2@174.549,26.147 ; v1(172.822,35.418) IC10_Filters3-4.12@174.549,35.418
  Bottom Layer w0.254: v1@172.568,26.147 v1@172.568,35.418
  other v1: 172.822,26.147
NetC6_Filters1-2_2: C6_Filters1-2.2 IC10_Filters1-2.5 IC11_Filters1-2.6 | length 18.5
  Top Layer w0.254: v1(172.606,85.49) IC11_Filters1-2.6@174.46,85.49 ; v1(176.167,76.25) 176.182,76.235 179.499,76.235 IC10_Filters1-2.5@179.514,76.219 181.496,76.219 C6_Filters1-2.2@181.877,76.6
  Bottom Layer w0.254: v1@172.617,85.49 174.098,84.008 174.098,78.204 175.889,76.414 175.924,76.414 176.087,76.25 v1(176.167,76.25)
NetC6_Filters3-4_2: C6_Filters3-4.2 IC10_Filters3-4.5 IC11_Filters3-4.6 | length 18.4
  Top Layer w0.254: v1(172.568,44.689) IC11_Filters3-4.6@174.422,44.689 ; v1(176.143,35.449) 176.159,35.434 179.461,35.434 IC10_Filters3-4.5@179.476,35.418 181.458,35.418 C6_Filters3-4.2@181.839,35.799
  Bottom Layer w0.254: v1(172.568,44.689) 172.661,44.689 172.834,44.516 173.886,43.464 173.886,37.762 v1@176.104,35.545
NetC9_Filters1-2_1: C9_Filters1-2.1 R13_Filters1-2.2 | length 2.1
  Top Layer w0.254: R13_Filters1-2.2@182.766,87.014 184.747,87.014 C9_Filters1-2.1@184.798,86.963
NetC9_Filters3-4_1: C9_Filters3-4.1 R13_Filters3-4.2 | length 2.1
  Top Layer w0.254: R13_Filters3-4.2@182.728,46.213 184.709,46.213 C9_Filters3-4.1@184.76,46.162
NetC10_Filters1-2_1: C10_Filters1-2.1 R18_Filters1-2.2 | length 2.1
  Top Layer w0.254: C10_Filters1-2.1@144.31,62.935 144.361,62.884 R18_Filters1-2.2@146.342,62.884
NetC10_Filters3-4_1: C10_Filters3-4.1 R18_Filters3-4.2 | length 2.1
  Top Layer w0.254: C10_Filters3-4.1@144.272,22.134 144.323,22.083 R18_Filters3-4.2@146.304,22.083
NetC11_Filters1-2_2: C11_Filters1-2.2 IC30_Filters1-2.5 IC31_Filters1-2.6 | length 18.9
  Top Layer w0.254: C11_Filters1-2.2@147.231,73.298 147.612,73.679 IC30_Filters1-2.5@149.593,73.679 149.609,73.664 152.911,73.664 v1(152.926,73.648) ; IC31_Filters1-2.6@154.648,64.408 v1(156.502,64.408)
  Bottom Layer w0.254: v1(152.926,73.648) 153.968,73.648 154.756,72.86 154.756,65.9 v1@156.248,64.408
NetC11_Filters3-4_2: C11_Filters3-4.2 IC30_Filters3-4.5 IC31_Filters3-4.6 | length 18.9
  Top Layer w0.254: C11_Filters3-4.2@147.193,32.497 147.574,32.878 IC30_Filters3-4.5@149.555,32.878 149.571,32.862 152.873,32.862 v1(152.888,32.847) ; IC31_Filters3-4.6@154.61,23.607 v1(156.464,23.607)
  Bottom Layer w0.254: v1(152.888,32.847) 153.852,32.847 154.502,32.197 154.502,25.315 v1@156.21,23.607
NetC12_Filters1-2_1: C12_Filters1-2.1 IC32_Filters1-2.1 R20_Filters1-2.2 R25_Filters1-2.2 R31_Filters1-2.1 | length 16
  Top Layer w0.254: R31_Filters1-2.1@145.834,82.935 145.884,82.935 146.883,81.936 146.883,81.866 147.181,81.568 147.281,81.568 147.978,82.266 148.446,82.266 148.467,82.286 151.008,82.286 151.614,81.68 154.521,81.68 155.994,81.68 156.756,80.918 ; R25_Filters1-2.2@156.756,78.916 156.756,80.918 ; C12_Filters1-2.1@158.153,81.388 157.683,80.918 156.756,80.918
NetC12_Filters1-2_2: C12_Filters1-2.2 IC30_Filters1-2.12 IC32_Filters1-2.2 | length 14.6
  Top Layer w0.254: IC30_Filters1-2.12@154.521,73.679 v1(156.248,73.679) ; IC32_Filters1-2.2@154.521,82.95 154.523,82.948 156.246,82.948 v1(156.248,82.95) 158.115,82.95 C12_Filters1-2.2@158.153,82.988
  Bottom Layer w0.254: v1@156.217,73.703 v1@156.217,82.974
NetC12_Filters3-4_1: C12_Filters3-4.1 IC32_Filters3-4.1 R20_Filters3-4.2 R25_Filters3-4.2 R31_Filters3-4.1 | length 16
  Top Layer w0.254: R31_Filters3-4.1@145.796,42.134 145.846,42.134 146.845,41.135 146.845,41.065 147.143,40.767 147.243,40.767 147.94,41.464 148.408,41.464 148.429,41.485 150.946,41.485 151.552,40.879 154.483,40.879 155.956,40.879 156.718,40.117 ; R25_Filters3-4.2@156.718,38.115 156.718,40.117 ; C12_Filters3-4.1@158.115,40.587 157.645,40.117 156.718,40.117
NetC12_Filters3-4_2: C12_Filters3-4.2 IC30_Filters3-4.12 IC32_Filters3-4.2 | length 14.6
  Top Layer w0.254: IC30_Filters3-4.12@154.483,32.878 v1(156.21,32.878) ; IC32_Filters3-4.2@154.485,42.147 156.208,42.147 v1(156.21,42.149) 158.077,42.149 C12_Filters3-4.2@158.115,42.187
  Bottom Layer w0.254: v1@155.956,32.878 v1@155.956,42.149
NetC27_Filters1-2_1: C27_Filters1-2.1 IC16_Filters1-2.1 Q7_Filters1-2.1 | length 3.9
  Top Layer w0.203: C27_Filters1-2.1@161.446,85.404 161.446,86.22 161.73,86.504 161.73,87.232 161.907,87.41 163.487,87.41 IC16_Filters1-2.1@163.589,87.512
NetC27_Filters1-2_2: C27_Filters1-2.2 IC16_Filters1-2.2 R52_Filters1-2.1 R58_Filters1-2.2 | length 12.4
  Top Layer w0.203: R52_Filters1-2.1@158.636,87.298 158.934,86.999 159.573,86.999 159.652,86.92 160.291,86.92 162.026,88.655 162.978,88.655 163.131,88.807 164.274,88.807 164.859,88.223 164.859,86.801 164.681,86.623 164.565,86.623 163.446,85.504 163.446,83.942 R58_Filters1-2.2@163.384,83.88
NetC27_Filters3-4_1: C27_Filters3-4.1 IC16_Filters3-4.1 Q7_Filters3-4.1 | length 3.9
  Top Layer w0.203: C27_Filters3-4.1@161.408,44.602 161.408,45.418 161.692,45.702 161.692,46.431 161.869,46.609 163.449,46.609 IC16_Filters3-4.1@163.551,46.711
NetC27_Filters3-4_2: C27_Filters3-4.2 IC16_Filters3-4.2 R52_Filters3-4.1 R58_Filters3-4.2 | length 12.5
  Top Layer w0.203: R52_Filters3-4.1@158.598,46.546 158.598,46.496 158.975,46.119 160.253,46.119 161.328,47.193 162.28,47.193 163.093,48.006 164.236,48.006 164.821,47.422 164.821,45.999 164.643,45.822 164.527,45.822 163.408,44.702 163.408,43.14 R58_Filters3-4.2@163.346,43.078
NetC28_Filters1-2_1: C28_Filters1-2.1 IC16_Filters1-2.7 Q8_Filters1-2.1 | length 12.5
  Top Layer w0.203: C28_Filters1-2.1@162.915,94.287 163.313,93.889 163.84,93.889 164.401,93.328 164.681,93.328 164.859,93.151 IC16_Filters1-2.7@164.859,92.439 164.859,91.225 165.406,90.678 v1(166.56,90.678) ; v1(168.542,89.84) 168.574,89.807 169.065,89.807 170.523,88.349 170.523,87.715 170.701,87.537 Q8_Filters1-2.1@171.082,87.537
  Bottom Layer w0.203: v1(166.56,90.678) 167.585,90.678 167.983,90.28 168.101,90.28 v1(168.542,89.84)
NetC28_Filters1-2_2: C28_Filters1-2.2 IC16_Filters1-2.6 R54_Filters1-2.1 R59_Filters1-2.2 | length 10.5
  Top Layer w0.203: C28_Filters1-2.2@164.993,94.207 R59_Filters1-2.2@166.404,94.207 166.129,93.931 IC16_Filters1-2.6@166.129,92.439 ; R59_Filters1-2.2@166.13,94.294 166.541,94.294 167.159,94.911 170.129,94.911 171.646,93.394 R54_Filters1-2.1@172.466,93.394
NetC28_Filters3-4_1: C28_Filters3-4.1 IC16_Filters3-4.7 Q8_Filters3-4.1 | length 13.2
  Top Layer w0.203: C28_Filters3-4.1@162.424,54 162.424,53.9 163.309,53.015 164.155,53.015 164.821,52.349 164.821,50.424 165.493,49.752 v1(166.522,49.752) ; v1(168.511,48.92) 169.113,48.92 170.485,47.548 170.485,46.914 170.663,46.736 Q8_Filters3-4.1@171.044,46.736
  Bottom Layer w0.203: v1(166.522,49.752) 167.672,49.752 168.504,48.92 v1(168.511,48.92)
NetC28_Filters3-4_2: C28_Filters3-4.2 IC16_Filters3-4.6 R54_Filters3-4.1 R59_Filters3-4.2 | length 7.5
  Top Layer w0.203: C28_Filters3-4.2@164.44,53.746 164.507,53.679 165.905,53.679 166.092,53.492 166.796,54.197 168.589,54.197 169.294,53.492 R54_Filters3-4.1@169.344,53.492 ; R59_Filters3-4.2@166.042,53.492 166.091,53.443 IC16_Filters3-4.6@166.091,51.638
NetIC4_1: IC4.1 R21.1 U1.10 | length 80.8
  Top Layer w0.203: IC4.1@133.593,83.661 133.686,83.754 134.554,83.754 135.382,84.582 v1(137.668,84.582)
  Top Layer w0.254: v1(82.894,48.791) 82.94,48.745 98.275,48.745 98.878,49.348 ; v1(82.931,40.132) R21.1@85.568,40.132 ; v1(123.88,84.51) 131.846,84.51 132.586,83.77 133.484,83.77 IC4.1@133.593,83.661
  Layer 2 w0.254: v1(123.88,49.094) v1(123.88,84.51)
  Bottom Layer w0.203: v1(137.668,84.582) 137.668,82.804 138.081,82.391 U1.10@139.03,82.391
  Bottom Layer w0.254: v1(82.894,48.791) 82.931,48.754 v1(82.931,40.132)
NetIC4_16: IC4.16 R22.1 U1.9 | length 62.7
  Top Layer w0.203: v1(126.521,83.017) 126.597,82.941 126.813,82.941 126.839,82.916 132.587,82.916 132.692,83.021 134.725,83.021 135.506,83.802 136.207,83.802 136.347,83.661 v1(140.367,83.661)
  Top Layer w0.254: R22.1@97.82,38.608 98.806,38.608 102.108,41.91
  Layer 2 w0.203: v1(126.492,41.656) 126.521,41.685 v1(126.521,83.017)
  Bottom Layer w0.203: U1.9@139.03,83.661 v1(140.367,83.661)
NetIC5_1: IC5.1 R34.1 | length 2.4
  Top Layer w0.254: IC5.1@94.165,50.419 96.236,50.419 R34.1@96.49,50.165
NetIC5_2: IC5.2 R35.1 | length 2.3
  Top Layer w0.203: IC5.2@94.165,51.689 R35.1@96.505,51.689
NetIC5_9: IC5.9 IC6.14 | length 23.2
  Top Layer w0.254: v1(86.106,41.402) IC6.14@88.784,41.402 ; v1(86.106,59.346) 86.125,59.327 88.697,59.327 IC5.9@88.715,59.309
  Bottom Layer w0.254: v1(86.106,41.402) v1(86.106,59.346)
NetIC5_15: IC5.15 R33.1 | length 2
  Top Layer w0.254: R33.1@86.741,51.689 IC5.15@88.715,51.689
NetIC6_1: IC6.1 R22.2 | length 2.4
  Top Layer w0.254: IC6.1@94.234,38.862 96.266,38.862 R22.2@96.52,38.608
NetIC6_2: IC6.2 R36.2 | length 2.3
  Top Layer w0.254: IC6.2@94.234,40.132 R36.2@96.52,40.132
NetIC6_3: IC6.3 R37.2 | length 2.4
  Top Layer w0.254: IC6.3@94.234,41.402 96.266,41.402 R37.2@96.52,41.656
NetIC6_4: IC6.4 R38.2 | length 2.5
  Top Layer w0.254: IC6.4@94.234,42.672 96.012,42.672 96.172,42.832 96.222,42.832 96.52,43.13 R38.2@96.52,43.18
NetIC6_5: IC6.5 R39.2 | length 2.6
  Top Layer w0.254: IC6.5@94.234,43.942 95.758,43.942 96.172,44.356 96.222,44.356 96.52,44.654 R39.2@96.52,44.704
NetIC6_6: IC6.6 R40.2 | length 2.7
  Top Layer w0.254: IC6.6@94.234,45.212 95.504,45.212 96.172,45.88 96.222,45.88 96.52,46.178 R40.2@96.52,46.228
NetIC6_7: IC6.7 R41.2 | length 2.8
  Top Layer w0.254: IC6.7@94.234,46.482 94.432,46.68 94.91,46.68 95.863,47.633 96.416,47.633 R41.2@96.52,47.737
NetIC6_15: IC6.15 R21.2 | length 1.9
  Top Layer w0.254: R21.2@86.868,40.132 IC6.15@88.784,40.132